# Altium PCB PCB1.PcbDoc
Units mil, origin at the board's own origin, x right, y up, seen from the top; angles counter-clockwise.
Board outline 994.28 x 876.17 mil, 4 copper layers (Top Layer, GND, POWER, Bottom Layer), stack 23.756 mil thick; 60 components, 56 nets, 295 pads, 99 vias.
Unrouted connection lines stored in the file: 2.
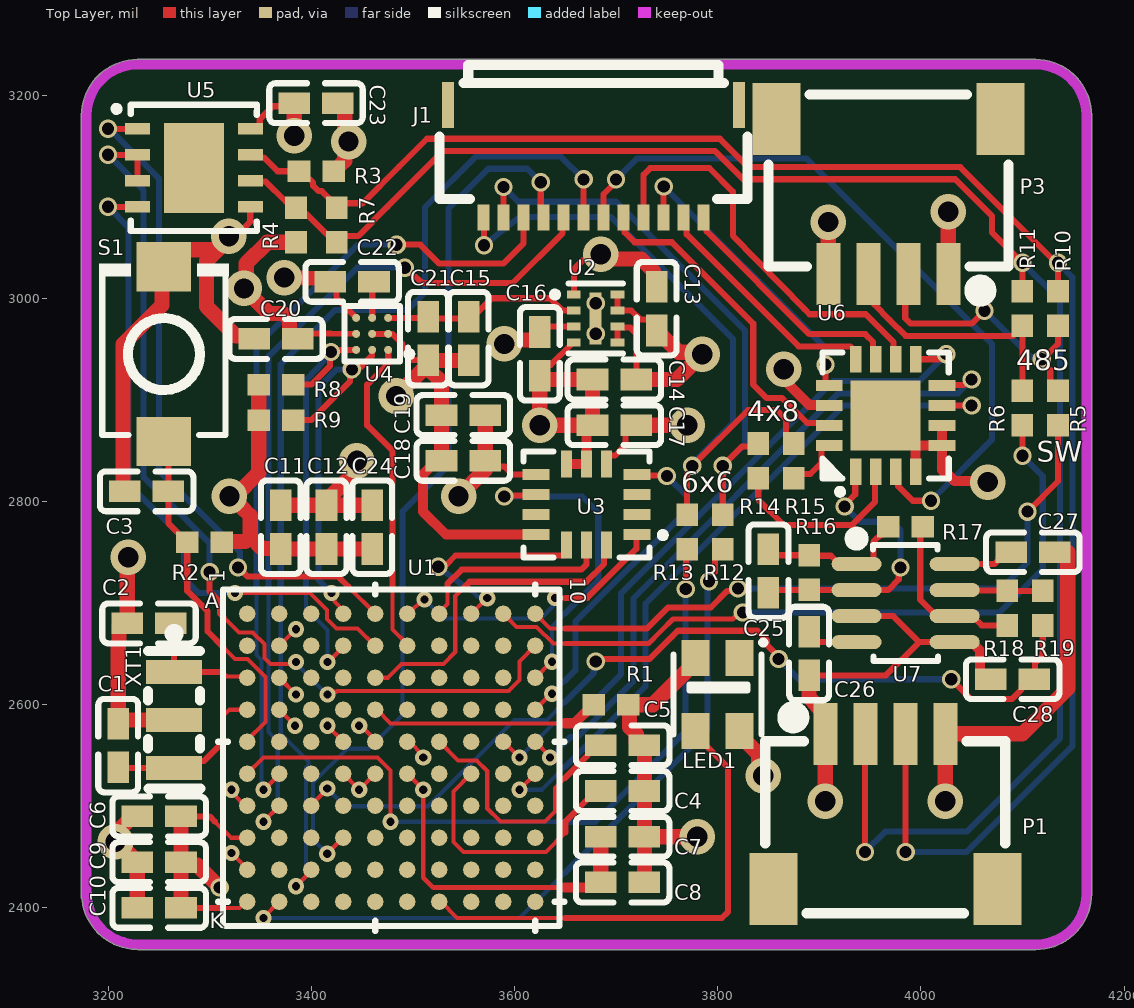
[diagram p0: Top Layer view]
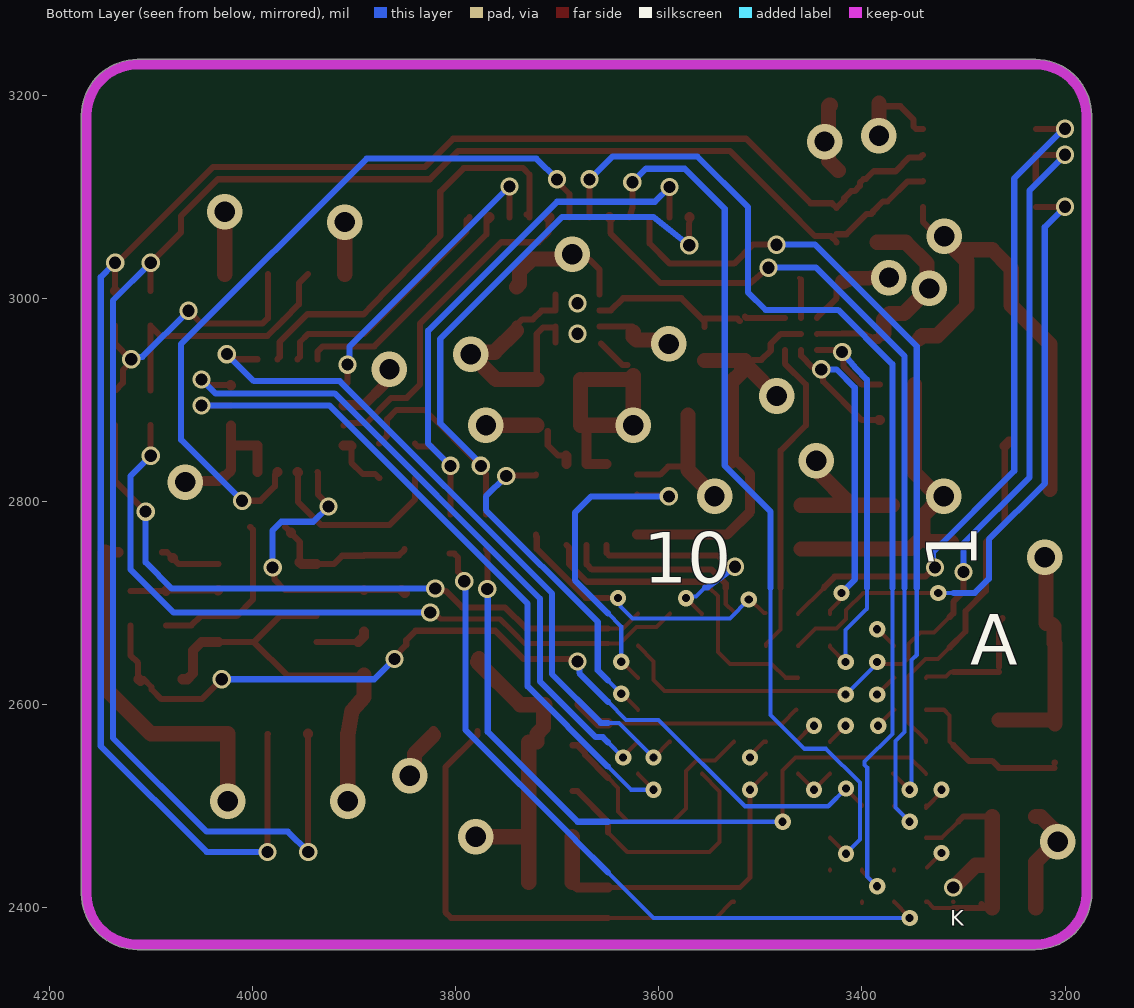
[diagram p1: Bottom Layer view, seen from below]
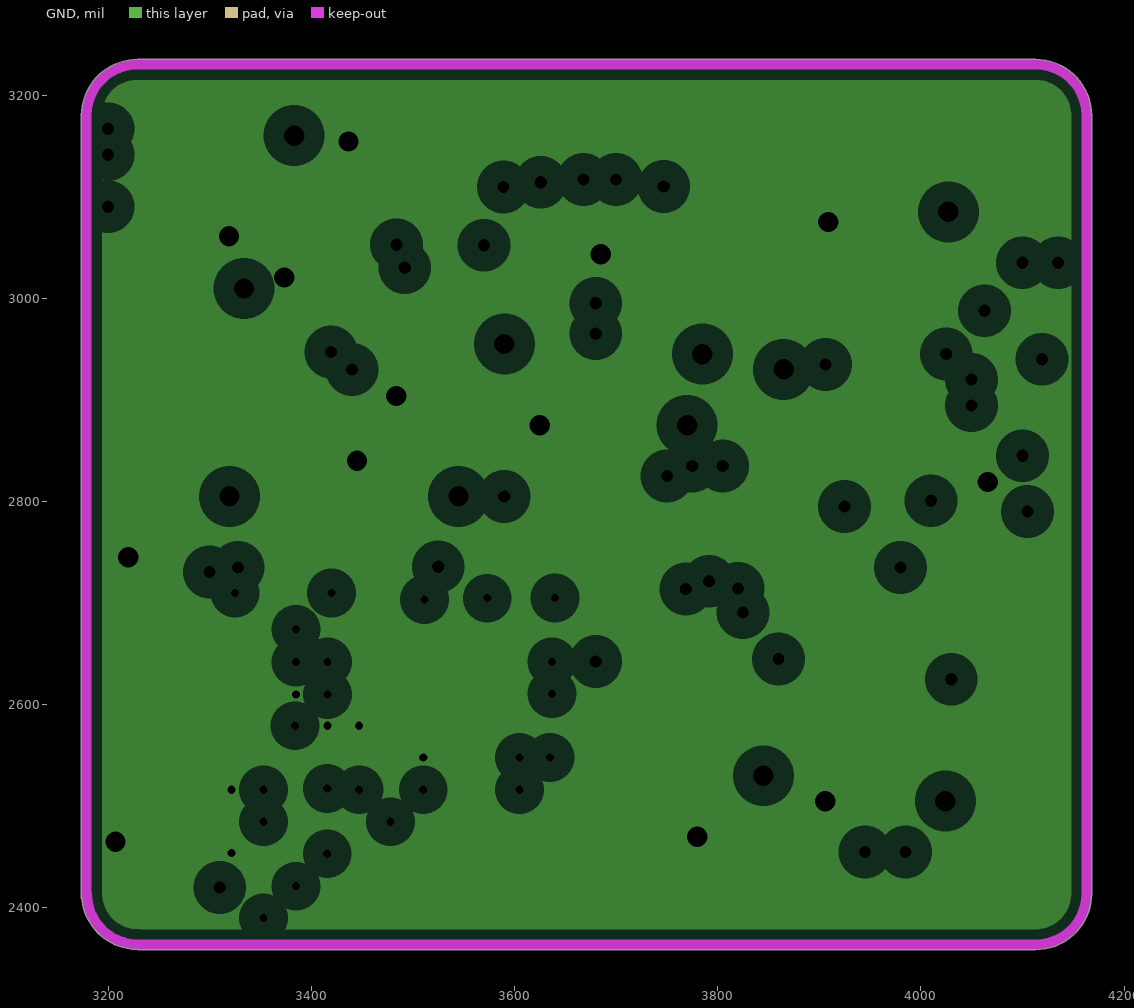
[diagram p2: GND, clearances drawn from the general rule]
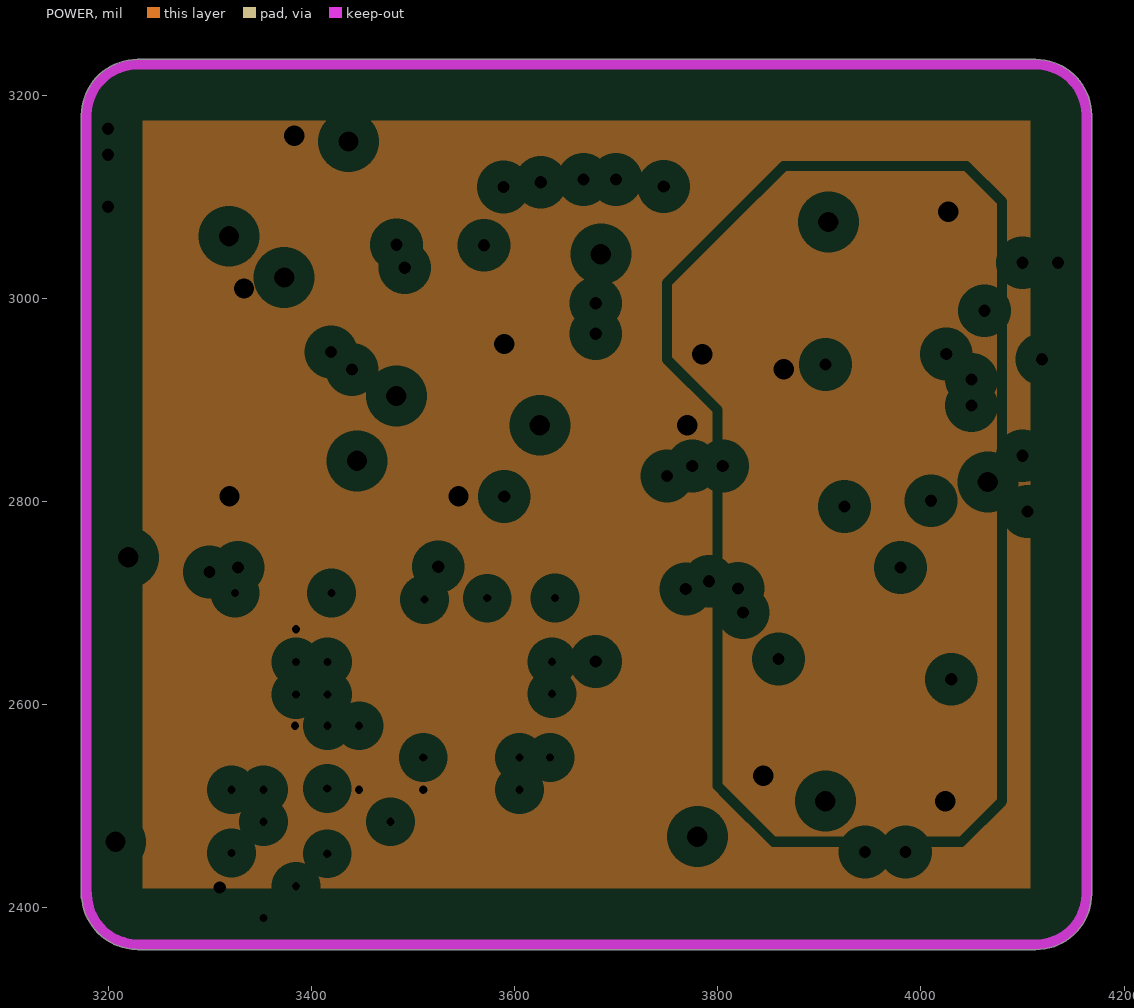
[diagram p3: POWER, clearances drawn from the general rule]
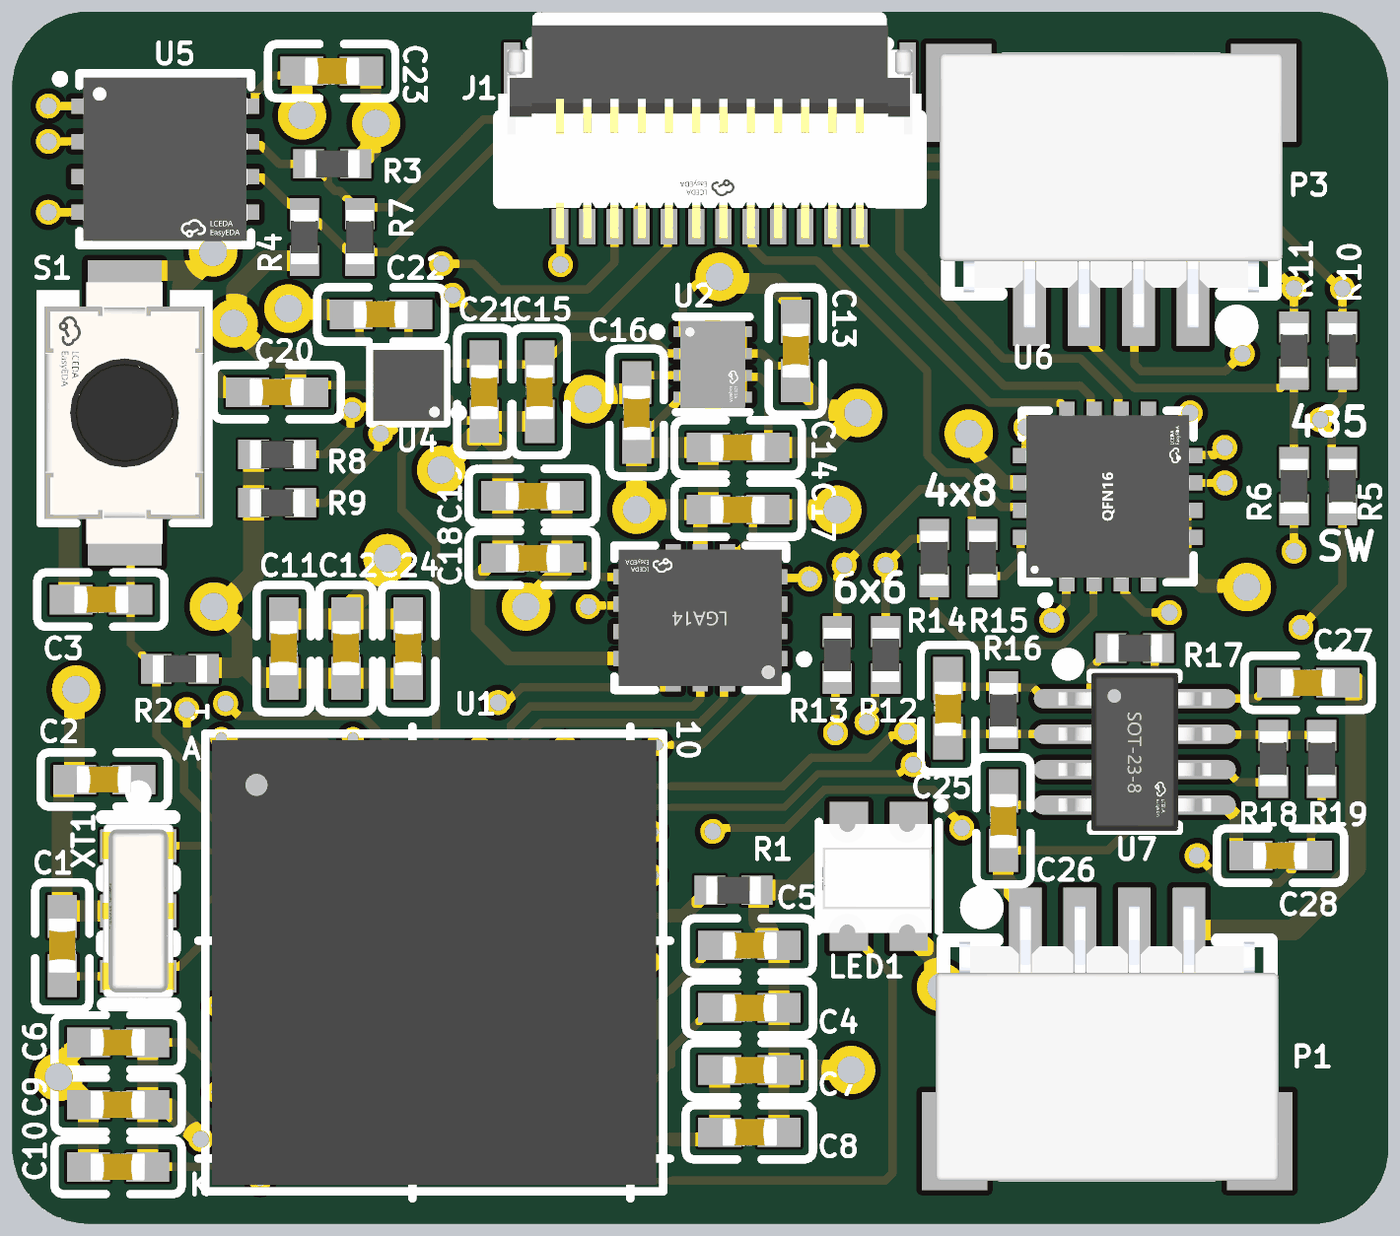
[diagram p4: 3D render of the assembled board from above, using the file's embedded part models]

## Layer stack, top to bottom
Top Solder: solder mask 0.4, Solder Resist, Dk 3.5
Top Layer: signal copper 1.4
Dielectric 2: prepreg 2.8, PP-006, Dk 4.1
GND: plane copper 1.378, net GND
Dielectric 1: dielectric 12.6, FR-4, Dk 4.8
POWER: plane copper 1.378, net (Multiple Nets)
Dielectric 3: prepreg 2.8, PP-006, Dk 4.1
Bottom Layer: signal copper 1.4
Bottom Solder: solder mask 0.4, Solder Resist, Dk 3.5

## Board outline
3173.84,2410 3173.84,3180 cw(c3228.86,3180) 3228.86,3235.01 4113.11,3235.01 cw(c4113.11,3180) 4168.13,3180 4168.13,2413.86 cw(c4113.11,2413.86) 4113.11,2358.84 3229.26,2358.84 3227.8,2359.06 cw(c3229.06,2414.06)

## Design rules (kind name [scope] priority, off if disabled: settings)
Clearance Clearance_BGA [WithinRoom('BGA')] p1: gap=3 ignorepadtopadclearanceinfootprint=TRUE
Clearance [All] p2: gap=6 ignorepadtopadclearanceinfootprint=FALSE
FanoutControl Fanout_BGA [IsBGA] p1: bgadir=Out bgaviamode=Centered fanoutstyle=BGA fanoutdirection=Alternating viagrid=1 // Fanout_BGA (Default Rule)
FanoutControl Fanout_Default [All] p5: bgadir=Out bgaviamode=Centered fanoutstyle=BGA fanoutdirection=Alternating viagrid=1 // Fanout_Default (Default Rule)
PlaneClearance [All] p1: clearance=20
PlaneConnect [All] p1: planeconnectstyle=Relief reliefexpansion=20 reliefentries=4 reliefconductorwidth=10 reliefairgap=10
PolygonConnect [All] p1: connectstyle=Relief reliefconductorwidth=10 reliefentries=4 polygonreliefangle="90 Angle" airgapwidth=10
RoomDefinition BGA [InComponentClass('Room Definition1')] p1: confinementstyle=ConfineIn formatcopy=TRUE lockcomponents=FALSE outline 3313.56,2385 3313.56,2715 3650,2715 3650,2385
RoutingVias RoutingVias_BGA [WithinRoom('BGA')] p1: holewidth=10 width=18 viastyle="Through Hole" minholewidth=10 minwidth=18 maxholewidth=10 maxwidth=18
RoutingVias [All] p2: holewidth=20 width=35 viastyle="Through Hole" minholewidth=10 minwidth=18 maxholewidth=20 maxwidth=35
ShortCircuit [All] p1: allowed=TRUE
SolderMaskExpansion [All] p1: expansion=4 istentingtop=FALSE
SupplyNets "Schematic Supply Nets" [InNet('+5V')] p1: voltage=0.000
SupplyNets "Schematic Supply Nets_5" [InNet('1.8V')] p2: voltage=0.000
SupplyNets "Schematic Supply Nets_3" [InNet('GND')] p3: voltage=0.000
SupplyNets "Schematic Supply Nets_2" [InNet('VDD')] p4: voltage=0.000
Width Width_BGA [WithinRoom('BGA')] p1: maxlimit=5 minlimit=4 preferedwidth=4 minimp=50.000000 maximp=50.000000 favimp=50.000000
Width [All] p2: maxlimit=20 minlimit=5 preferedwidth=6 minimp=50.000000 maximp=50.000000 favimp=50.000000
25 further rules are at their usual default settings.

## Components (designator, comment, footprint, x,y, rotation, side; value= is the part's Value field where it differs from the comment)
C1 "20pF" C0402 3210,2560 r270 top
C2 "20pF" C0402 3240,2680 r0 top
C3 "0.1μF" C0402 3238.22,2810 r180 top
C4 "2.2μF" C0402 3706.78,2515 r180 top
C5 "2.2μF" C0402 3706.78,2560 r180 top
C6 "1μF" C0402 3250,2490 r0 top
C7 "4.7μF" C0402 3706.78,2470 r180 top
C8 "0.1μF" C0402 3706.78,2425 r180 top
C9 "0.1μF" C0402 3250,2445 r0 top
C10 "0.1μF" C0402 3250,2400 r0 top
C11 "0.1μF" C0402 3370,2775 r270 top
C12 "0.1μF" C0402 3415,2775 r270 top
C13 "1μF" C0402 3740,2990 r270 top
C14 "1μF" C0402 3698,2920 r0 top
C15 "1μF" C0402 3555,2960 r90 top
C16 "1μF" C0402 3625,2945 r90 top
C17 "10nF" C0402 3698,2875 r0 top
C18 "0.1μF" C0402 3550,2840 r180 top
C19 "2.2μF" C0402 3550,2885 r180 top
C20 "0.1μF" C0402 3365,2960 r0 top
C21 "0.1μF" C0402 3515,2960 r90 top
C22 "2.2μF" C0402 3440,3016.19 r0 top
C23 "0.1μF" C0402 3405,3192 r180 top
C24 "0.1μF" C0402 3460,2775 r270 top
C25 "30pF" C0402 3850,2731.14 r90 top
C26 "0.1μF" C0402 3890,2650 r90 top
C27 "0.1μF" C0402 4110,2750 r0 top
C28 "1μF" C0402 4090,2625 r0 top
J1 "AFH05-S12FIA-1H" FPC-SMD_12P-P0.50_GT-F0501SR10-12S1101 3677.95,3135 r180 top
LED1 "WS2812B-2020" LED-SMD_4P-L2.0-W2.0-TL_WS2812B-2020 3800,2610 r270 top
P1 "Header 4" CONN-SMD_XDWF-0910-04P 3965,2495 r0 top
P3 "Header 4" CONN-SMD_XDWF-0910-04P 3968,3100 r180 top
R1 "10K" R0402 3695,2600 r180 top
R2 "10K" R0402 3295,2760 r0 top
R3 "10K" R0402 3405,3125 r180 top
R4 "10K" R0402 3385,3072.04 r270 top
R5 "22R" R0402 4135,2892.04 r90 top
R6 "22R" R0402 4100,2892.04 r90 top
R7 "120R" R0402 3425,3072.04 r90 top
R8 "10K" R0402 3365.32,2915 r0 top
R9 "10K" R0402 3365.32,2880 r0 top
R10 "0R" R0402 4135,2990 r90 top
R11 "0R" R0402 4100,2990 r270 top
R12 "0R" R0402 3805,2770 r90 top
R13 "0R" R0402 3770,2770 r270 top
R14 "0R" R0402 3840,2840 r90 top
R15 "0R" R0402 3875,2840 r270 top
R16 "1K" R0402 3890,2730 r90 top
R17 "10K" R0402 3985,2775 r0 top
R18 "10K" R0402 4085,2695 r90 top
R19 "100R" R0402 4120,2695 r270 top
S1 "SW-PB" SW-SMD_L3.9-W3.0-P4.45 3255,2945 r90 top
U1 "STM32H743VIH6" TFBGA100 3478.74,2547.76 r0 top
U2 "AP7345D-1833RH4-7" XDFN-8_L1.6-W1.2-P0.40-BL-EP 3680,2980 r270 top
U3 "ICM-42688-P" LGA-14_L3.0-W2.5-P0.50-TL 3670.98,2796.93 r180 top
U4 "BMM350" WLCSP-9_L1.3-W1.3-R3-C3-P0.40-TL 3460,2965 r180 top
U5 "SIT3088ETK" DFN-8_L3.0-W3.0-P0.65-BL-EP 3284.39,3128.38 r270 top
U6 "RS2251XTQC16" QFN-16_L3.0-W3.0-P0.50-BL-EP1.7 3965.41,2884.53 r0 top
U7 "LM358LVIDDFR" SOT-23-8_L2.9-W1.6-P0.65-LS2.8-BR 3985,2700 r180 top
XT1 "8MHz 3PIN" "8MHz 0.07% OSC-SMD_3P-L3.2-W1.3-P1.20-L" 3265,2585 r270 top

## Footprints (in the part's own frame and the unit in brackets; to place one, negate y for a bottom-side part, rotate by r counter-clockwise, add the part's x,y. Pads: shape width x height; smd on the part's side, far side on the other; paste and mask are expansions set on the pad)
"8MHz 0.07% OSC-SMD_3P-L3.2-W1.3-P1.20-L" [mm]
  rect 0.6x1.4 smd paste+0 mask+0.051: 1(-1.199,0) 2(0,0) 3(1.199,0)
  silkscreen extent -2.28,-0.65 1.72,0.66, body extent -1.6,-0.66 1.6,0.66, height 0.81
C0402 [mm]
  rect 0.79x0.54 smd mask+0.051: 1(-0.537,0) 2(0.553,0)
  silkscreen extent -1.16,-0.5 1.18,0.5, body extent -0.5,-0.25 0.5,0.25, height 0.5
CONN-SMD_XDWF-0910-04P [mm]
  rect 0.6x1.55 smd: 1(-1.5,1.938) 2(-0.5,1.938) 3(0.5,1.938) 4(1.5,1.938)
  rect 1.2x1.8 smd: 5(-2.8,-1.937) 6(2.8,-1.937)
  silkscreen extent -3,-2.55 3,2.55, body extent -3.15,-2.67 3.15,2.38, height 3.14
DFN-8_L3.0-W3.0-P0.65-BL-EP [mm] "SIT3088ETK"
  rect 0.28x0.625 smd: 1(-0.975,-1.412) 2(-0.325,-1.412) 3(0.325,-1.412) 4(0.975,-1.412) 5(0.975,1.412) 6(0.325,1.412) 7(-0.325,1.412) 8(-0.975,1.412)
  rect 2.25x1.5 smd: 9(0,0)
  silkscreen extent -1.58,-2.01 1.58,1.58, body extent -1.5,-1.51 1.5,1.51, height 0.92
FPC-SMD_12P-P0.50_GT-F0501SR10-12S1101 [mm]
  rect 0.3x0.65 smd paste+0 mask+0.05: 1(-2.749,1.405) 2(-2.251,1.405) 3(-1.751,1.405) 4(-1.25,1.405) 5(-0.75,1.405) 6(-0.249,1.405) 7(0.251,1.405) 8(0.751,1.405) 9(1.25,1.405) 10(1.751,1.405) 11(2.251,1.405) 12(2.752,1.405)
  rect 0.3x1.15 smd paste+0 mask+0.05: 13(-3.635,-1.405) 14(3.635,-1.405)
  silkscreen extent -3.85,-2.4 3.85,0.95, body extent -3.89,-2.29 3.89,1.63, height 1.03
LED-SMD_4P-L2.0-W2.0-TL_WS2812B-2020 [mm] "WS2812B-2020"
  rect 0.9x0.7 smd: 1(-0.915,0.55) 2(-0.915,-0.55) 3(0.915,-0.55) 4(0.915,0.55)
  silkscreen extent -1.3,-1.1 1,1.15, body extent -0.97,-1.04 1.03,0.97, height 0.84
LGA-14_L3.0-W2.5-P0.50-TL [mm] "ICM-42688-P"
  rect 0.675x0.28 smd: 1(-1.262,0.75) 2(-1.262,0.25) 3(-1.262,-0.25) 4(-1.262,-0.75) 8(1.262,-0.75) 9(1.262,-0.25) 10(1.262,0.25) 11(1.262,0.75)
  rect 0.28x0.675 smd: 5(-0.5,-1.012) 6(0,-1.012) 7(0.5,-1.012) 12(0.5,1.012) 13(0,1.012) 14(-0.5,1.012)
  silkscreen extent -1.98,-1.33 1.58,1.33, body extent -1.5,-1.25 1.5,1.25, height 0.92
QFN-16_L3.0-W3.0-P0.50-BL-EP1.7 [mm] "RS2251XTQC16 / QFN-16L(3x3)"
  rect 0.28x0.665 smd mask+0.051: 1(-0.75,-1.407) 2(-0.25,-1.407) 3(0.25,-1.407) 4(0.75,-1.407) 9(0.75,1.407) 10(0.25,1.407) 11(-0.25,1.407) 12(-0.75,1.407)
  rect 0.665x0.28 smd mask+0.051: 5(1.407,-0.75) 6(1.407,-0.25) 7(1.407,0.25) 8(1.407,0.75) 13(-1.407,0.75) 14(-1.407,0.25) 15(-1.407,-0.25) 16(-1.407,-0.75)
  rect 1.75x1.75 smd mask+0.051: 17(0,0)
  silkscreen extent -1.58,-1.98 1.58,1.58, body extent -1.5,-1.5 1.5,1.5, height 0.43
R0402 [mm]
  rect 0.566x0.54 smd mask+0.051: 1(-0.433,0) 2(0.433,0)
  body extent -0.5,-0.25 0.5,0.25, height 0.36
SOT-23-8_L2.9-W1.6-P0.65-LS2.8-BR [mm] "LM358LVIDDFR / TSOT-23-8"
  oval 1.252x0.35 smd: 1(1.226,-0.975) 2(1.226,-0.325) 3(1.226,0.325) 4(1.226,0.975) 5(-1.226,0.975) 6(-1.226,0.325) 7(-1.226,-0.325) 8(-1.226,-0.975)
  silkscreen extent -0.81,-1.76 1.38,1.45, body extent -1.41,-1.45 1.41,1.45, height 1.65
SW-SMD_L3.9-W3.0-P4.45 [mm] "TS-1088R-02026"
  rect 1.23x1.36 smd: 1(-2.185,0) 2(2.185,0)
  silkscreen extent -2.03,-1.62 2.25,1.62, body extent -2.4,-1.45 2.4,1.45, height 1.95
TFBGA100 [mil]
  round 16 smd paste+0 mask+3: A1(-141.73,141.73) A2(-110.24,141.73) A3(-78.74,141.73) A4(-47.24,141.73) A5(-15.75,141.73) A6(15.75,141.73) A7(47.24,141.73) A8(78.74,141.73) A9(110.24,141.73) A10(141.73,141.73) B1(-141.73,110.24) B2(-110.24,110.24) B3(-78.74,110.24) B4(-47.24,110.24) B5(-15.75,110.24) B6(15.75,110.24) B7(47.24,110.24) B8(78.74,110.24) B9(110.24,110.24) B10(141.73,110.24) C1(-141.73,78.74) C2(-110.24,78.74) C3(-78.74,78.74) C4(-47.24,78.74) C5(-15.75,78.74) C6(15.75,78.74) C7(47.24,78.74) C8(78.74,78.74) C9(110.24,78.74) C10(141.73,78.74) D1(-141.73,47.24) D2(-110.24,47.24) D3(-78.74,47.24) D4(-47.24,47.24) D5(-15.75,47.24) D6(15.75,47.24) D7(47.24,47.24) D8(78.74,47.24) D9(110.24,47.24) D10(141.73,47.24) E1(-141.73,15.75) E2(-110.24,15.75) E3(-78.74,15.75) E4(-47.24,15.75) E5(-15.75,15.75) E6(15.75,15.75) E7(47.24,15.75) E8(78.74,15.75) E9(110.24,15.75) E10(141.73,15.75) F1(-141.73,-15.75) F2(-110.24,-15.75) F3(-78.74,-15.75) F4(-47.24,-15.75) F5(-15.75,-15.75) F6(15.75,-15.75) F7(47.24,-15.75) F8(78.74,-15.75) F9(110.24,-15.75) F10(141.73,-15.75) G1(-141.73,-47.24) G2(-110.24,-47.24) G3(-78.74,-47.24) G4(-47.24,-47.24) G5(-15.75,-47.24) G6(15.75,-47.24) G7(47.24,-47.24) G8(78.74,-47.24) G9(110.24,-47.24) G10(141.73,-47.24) H1(-141.73,-78.74) H2(-110.24,-78.74) H3(-78.74,-78.74) H4(-47.24,-78.74) H5(-15.75,-78.74) H6(15.75,-78.74) H7(47.24,-78.74) H8(78.74,-78.74) H9(110.24,-78.74) H10(141.73,-78.74) J1(-141.73,-110.24) J2(-110.24,-110.24) J3(-78.74,-110.24) J4(-47.24,-110.24) J5(-15.75,-110.24) J6(15.75,-110.24) J7(47.24,-110.24) J8(78.74,-110.24) J9(110.24,-110.24) J10(141.73,-110.24) K1(-141.73,-141.73) K2(-110.24,-141.73) K3(-78.74,-141.73) K4(-47.24,-141.73) K5(-15.75,-141.73) K6(15.75,-141.73) K7(47.24,-141.73) K8(78.74,-141.73) K9(110.24,-141.73) K10(141.73,-141.73)
  silkscreen extent -170,-170 170,170, body extent -161,-161 161,161, height 43
WLCSP-9_L1.3-W1.3-R3-C3-P0.40-TL [mm] "BMM350"
  round 0.2 smd paste-100 mask+0.051: A1(-0.4,0.4) A2(0,0.4) A3(0.4,0.4) B1(-0.4,0) B2(0,0) B3(0.4,0) C2(0,-0.4) C3(0.4,-0.4)
  round 0.2 smd mask+0.051: C1(-0.4,-0.4)
  silkscreen extent -1,-0.7 0.7,0.7, body extent -0.65,-0.65 0.65,0.65, height 0.53
XDFN-8_L1.6-W1.2-P0.40-BL-EP [mm] "AP7345D-1833RH4-7"
  rect 0.2x0.345 smd: 1(-0.6,-0.547) 2(-0.2,-0.547) 3(0.2,-0.547) 4(0.6,-0.547) 5(0.6,0.547) 6(0.2,0.547) 7(-0.2,0.547) 8(-0.6,0.547)
  rect 1.3x0.3 smd: 9(0,0)
  silkscreen extent -0.88,-1.09 0.88,0.68, body extent -0.81,-0.61 0.81,0.61, height 0.4

## Part data
C1 C2 C3 C4 C5 C6 C7 C8 C9 C10 C11 C12 C13 C14 C15 C16 C17 C18 C19 C20 C21 C22 C23 C24 C25 C26 C27 C28: library part "Cap Semi", "Capacitor (Semiconductor SIM Model)", LatestRevisionDate=29-May-2009, LatestRevisionNote="IPC-7351 Footprint Added.", PackageDescription="Chip Capacitor", PackageReference=C1206, Published=8-Jun-2000, Publisher="Altium Limited"
P1 P3: "XDWF-0910-04P", LatestRevisionDate=17-Jul-2002, LatestRevisionNote="Re-released for DXP Platform.", Publisher="Altium Limited"
R1 R2 R3 R4 R5 R6 R7 R8 R9 R10 R11 R16 R17 R18 R19: library part Res2, "Resistor", LatestRevisionDate=17-Jul-2002, LatestRevisionNote="Re-released for DXP Platform.", PackageDescription="Axial Device, Thru-Hole; 2 Leads; 0.4 in Pin Spacing", PackageReference=AXIAL-0.4, Published=8-Jun-2000, Publisher="Altium Limited"
R12: library part Res2, "Resistor / 6x6 Y2", LatestRevisionDate=17-Jul-2002, LatestRevisionNote="Re-released for DXP Platform.", PackageDescription="Axial Device, Thru-Hole; 2 Leads; 0.4 in Pin Spacing", PackageReference=AXIAL-0.4, Published=8-Jun-2000, Publisher="Altium Limited"
R13: library part Res2, "Resistor / 6x6 Y1", LatestRevisionDate=17-Jul-2002, LatestRevisionNote="Re-released for DXP Platform.", PackageDescription="Axial Device, Thru-Hole; 2 Leads; 0.4 in Pin Spacing", PackageReference=AXIAL-0.4, Published=8-Jun-2000, Publisher="Altium Limited"
R14: library part Res2, "Resistor / 4x8 X8", LatestRevisionDate=17-Jul-2002, LatestRevisionNote="Re-released for DXP Platform.", PackageDescription="Axial Device, Thru-Hole; 2 Leads; 0.4 in Pin Spacing", PackageReference=AXIAL-0.4, Published=8-Jun-2000, Publisher="Altium Limited"
R15: library part Res2, "Resistor / 4x8 X7", LatestRevisionDate=17-Jul-2002, LatestRevisionNote="Re-released for DXP Platform.", PackageDescription="Axial Device, Thru-Hole; 2 Leads; 0.4 in Pin Spacing", PackageReference=AXIAL-0.4, Published=8-Jun-2000, Publisher="Altium Limited"
S1: "TS-1088R-02026", LatestRevisionDate=17-Jul-2002, LatestRevisionNote="Re-released for DXP Platform.", PackageDescription="Switch; 2 Leads", PackageReference=SPST-2, Published=24-Mar-1999, Publisher="Altium Limited"
U1: "No Description Available", Mfr_Name=STMicroelectronics, RefDes=RefDes, Type=Type
XT1: library part "8MHz 0.07% 3PIN_1", "CSTNE8M00GH5C000R0"

## Via types
v1: diameter 18, hole 12, Top Layer to Bottom Layer, 45 vias
v2: diameter 16, hole 8, Top Layer to Bottom Layer, 30 vias
v3: diameter 35, hole 20, Top Layer to Bottom Layer, 24 vias

## Nets (pads, with @x,y where several pads share a name; then routed paths per layer and width w, separated by ;. In a path a pad name is that pad's centre, name@x,y a point inside that pad or via, vN(x,y) a via of type N, cw(c..) or ccw(c..) an arc to the next point about the centre after c; other vN are vias at no path point)
1.8V: C15.2 C21.2 U2.2 U4.C1 | length 199
  Top Layer w6: U4.C1 3513.97,2980.75 C21.2 ; C21.2@3520.19,2977.56 3522.63,2980 C15.2@3555,2980 ; C15.2@3555,2971.7 3555,2977.37 3577.63,3000 3635,3000 3646.97,2988.03 3658.28,2988.03 U2.2
+5V: C13.2 C14.2 C27.2 LED1.4 P1.4 P3.1 U2.5 U2.6 U2.7 U2.8 U6.14 | length 805.2
  Top Layer w6: U2.5 U2.6 3702.62,2971.07 3713.93,2971.07 3720,2965 C14.2@3720,2925 ; U2.8 U2.7 3715.23,2987.87 3723.98,2979.12 3734.11,2979.12 C13.2@3740,2973.22
  Top Layer w10: C13.2@3740,2968.3 C13.2@3740,2973.22 ; LED1.4@3821.66,2570.04 LED1.4 ; v3@3840.22,2534.78 v3(3845,2530) ; v3(3865,2930) 3869.78,2925.22 3869.78,2915.22 3890.12,2894.88 3909.49,2894.88 U6.14 ; C27.2 C27.2@4144.61,2750 ; 4144.61,2616.1 4144.61,2616.49
  Top Layer w15: C14.2 3760,2920 v3(3785,2945) 3783.1,2946.9 3761.41,2946.9 C13.2@3740,2968.3 ; LED1.4@3821.66,2570.04 3840.22,2551.48 v3@3840.22,2534.78 ; v3(4024.05,2505) P1.4 4099.8,2571.28 4144.61,2616.1 ; P3.1 v3(4027.05,3085) ; 4144.61,2616.49 C27.2@4144.61,2750
A: U1.E9 U6.9 | length 683.4
  Top Layer w4: U1.E9 3589.24,2563.5 3604.74,2548 v2(3605,2548)
  Top Layer w6: U6.9 4017.78,2939.94 v1@4022.84,2945
  Bottom Layer w4: v2(3605,2548) 3639.03,2582.03 3650,2582.03
  Bottom Layer w6: 3650,2582.03 3657.03,2582.03 3705,2630 3705,2709.45 3913.92,2918.37 3998.37,2918.37 v1(4025,2945)
ADC1_INP3(Y4/Y6): J1.7 U1.J3 | length 1031.3
  Top Layer w4: v2(3385,2421.26) 3400,2436.26 U1.J3
  Top Layer w6: J1.7 v1(3668.07,3117)
  Bottom Layer w4: 3370,2715 3370,2571.16 3397.31,2543.85 3397.31,2540.54 3394.75,2537.97 3394.75,2431.01 v2(3385,2421.26)
  Bottom Layer w6: 3370,2715 3370,2935 3423.48,2988.48 3494.89,2988.48 3511.97,3005.56 3511.97,3089.66 3561.8,3139.48 3645.59,3139.48 v1(3668.07,3117)
ADC1_INP4(X2): J1.2 U6.12 | length 239.7
  Top Layer w6: J1.2@3767.48,3078.78 3769.48,3076.78 3769.48,3063 3879.84,2952.64 3930.76,2952.64 3935.88,2947.52 U6.12
  Top Layer w10: J1.2 J1.2@3767.48,3078.78
ADC1_INP5(X5): J1.5 U6.15 | length 330.7
  Top Layer w6: J1.5@3708.38,3078.78 3708.38,3065 3718.28,3055.1 3754.9,3055.1 3835,2975 3835,2915 3848,2902 3863.2,2902 3888,2877.2 3907.49,2877.2 U6.15
  Top Layer w10: J1.5 J1.5@3708.38,3078.78
ADC1_INP7(X3): J1.3 U6.13 | length 293.5
  Top Layer w6: J1.3 v1(3746.87,3110) ; v1(3906.22,2934.64) 3906.22,2916.57 U6.13@3910,2916.57
  Bottom Layer w6: v1(3746.87,3110) 3904.23,2952.64 3904.23,2936.63 v1(3906.22,2934.64)
ADC1_INP8(Y2/Y4): J1.9 U1.H4 | length 878.3
  Top Layer w4: v2(3415.75,2453.27) U1.H4
  Top Layer w6: v1(3625.9,3114.17) 3625.9,3089.48 J1.9
  Bottom Layer w4: v2(3415.75,2453.27) 3401.75,2467.27 3401.75,2523.16 3435.17,2556.58 3456.58,2556.58 3490,2590 3490,2715
  Bottom Layer w6: 3490,2715 3490,2790.3 3535,2835.3 3535,3088.13 3574.35,3127.48 3612.59,3127.48 v1(3625.9,3114.17)
ADC1_INP9(X1): J1.1 U6.11 | length 242.1
  Top Layer w6: J1.1 3789.08,3076.78 3789.08,3065.92 3890.24,2964.76 3906.44,2964.64 3945.36,2964.64 3953.06,2956.94 3953.06,2942.45 U6.11
ADC1_INP10(X7/Y1): J1.12 R13.1 R15.1 | length 669.5
  Top Layer w6: J1.12@3569.81,3079.49 3570,3069.89 v1(3570,3052.17) ; R13.1 3770,2826.75 3775,2831.75 v1(3775,2835) 3830,2890 3858.23,2890 3867.37,2880.86 3867.37,2864.67 R15.1
  Top Layer w10: J1.12 J1.12@3569.81,3079.49
  Bottom Layer w6: v1(3570,3052.17) 3605,3080 3695,3080 3815,2960 3815,2876.97 3775,2836.97 v1(3775,2835)
ADC1_INP11(Y1/Y3): J1.10 U1.F2 | length 807.7
  Top Layer w4: v2@3353.75,2516.54 U1.F2@3369.5,2532.28
  Top Layer w6: v1(3484.04,3052.74) 3507.26,3052.74 3525.83,3034.17 3589.17,3034.17 3609.02,3054.02 J1.10
  Bottom Layer w4: 3346,2715 3346,2649 3351,2644 3351,2518.26 v2(3353,2516.26)
  Bottom Layer w6: 3346,2715 3346,2952.75 3445.99,3052.74 v1(3484.04,3052.74)
ADC1_INP14(X4): J1.4 U6.10 | length 409.4
  Top Layer w6: J1.4@3730.08,3082.59 J1.4 3727.17,3121.66 3733.51,3128 3792,3128 3815,3105 3815,3061.69 3885.13,2989.48 3890.41,2984.21 3945.79,2984.21 3972.99,2957.01 3972.99,2942.2 U6.10
ADC1_INP15(X8/Y2): J1.11 R12.2 R14.2 | length 560.3
  Top Layer w6: J1.11 v1(3589.32,3109.48) ; R12.2 v1(3805,2835) 3823.88,2853.88 3836.84,2853.88 R14.2
  Bottom Layer w6: v1(3589.32,3109.48) 3603.81,3095 3700,3095 3827,2968 3827,2857 v1(3805,2835)
ADC1_INP16(Y3/Y5): J1.8 U1.G2 | length 857.1
  Top Layer w4: v2(3353,2484.76) U1.G2@3368.5,2500.27
  Top Layer w6: v1(3491.97,3030.08) 3509.52,3015 3598.3,3015 3647.47,3064.17 J1.8@3647.47,3078.78
  Top Layer w10: J1.8@3647.47,3078.78 J1.8
  Bottom Layer w4: v2(3353,2484.76) 3367,2498.76 3367,2564.26 3358,2573.26 3358,2715
  Bottom Layer w6: 3358,2715 3358,2943 3445.08,3030.08 v1(3491.97,3030.08)
ADC1_INP17(X6): J1.6 U6.3 | length 729.1
  Top Layer w6: J1.6 3687.77,3102.61 v1@3700,3114.84 ; U6.3@3975.12,2828.99 3977.76,2826.36 3977.76,2814.97 3992,2800.73 4009.9,2800.73 v1(4010,2800.63)
  Top Layer w10: v1@3700,3114.84 v1(3700,3117) ; U6.3@3975.12,2828.99 U6.3
  Bottom Layer w6: v1(3700,3117) 3720.48,3137.48 3887.52,3137.48 4070,2955 4070,2860.63 v1(4010,2800.63)
B: U1.E10 U6.8 | length 667.8
  Top Layer w4: U1.E10 3635,2548.98 v2(3635,2548)
  Top Layer w6: U6.8@4021.33,2914.57 4042.41,2914.57 v1@4047.84,2920
  Top Layer w10: U6.8 U6.8@4021.33,2914.57
  Bottom Layer w4: v2(3635,2548) 3650,2563
  Bottom Layer w6: 3650,2563 3655.03,2568.03 3662.06,2568.03 3717,2622.97 3717,2704.48 3918.89,2906.37 4036.37,2906.37 v1@4048.47,2918.47
  Bottom Layer w10: v1@4048.47,2918.47 v1(4050,2920)
BMM350_INT: U1.B6 U4.A1 | length 316.2
  Top Layer w4: 3480,2715 3480,2674.1 3494.49,2659.62 U1.B6
  Top Layer w6: U4.A1 3475.75,2935.75 3455,2915 3455,2875 3480,2850 3480,2715
C: U1.F10 U6.7 | length 700.7
  Top Layer w4: v2(3605,2516.26) 3605,2516.4 3620.47,2531.87 U1.F10
  Top Layer w6: U6.7 v1(4050,2894.37)
  Bottom Layer w4: v2(3605,2516.26) 3627.26,2516.26 3650,2539
  Bottom Layer w6: 3650,2539 3729,2618 3729,2699.51 3923.86,2894.37 v1@4049.37,2894.37
  Bottom Layer w10: v1@4049.37,2894.37 v1(4050,2894.37)
GND: C1.1 C2.1 C3.2 C4.1 C5.1 C6.1 C7.1 C8.1 C9.1 C10.1 C11.1 C12.1 C13.1 C14.1 C15.1 C16.1 C17.1 C18.2 C19.2 C20.1 C21.1 C22.1 C23.1 C24.1 C26.1 C28.1 LED1.2 P1.1 P3.4 R1.1 R3.1 S1.2 U1.C2 U1.E4 U1.E5 U1.E6 U1.G1 U1.J1 U2.1 U2.4 U3.6 U3.7 U3.11 U4.B1 U4.B2 U4.C3 U5.5 U6.4 U6.5 U6.6 U6.17 U7.3 U7.5 XT1.2 | length 3046.7
  Top Layer w4: v2(3321.56,2453.95) U1.J1@3336,2439.51 ; v2@3321.56,2513.95 U1.G1@3336,2499.51 ; U1.G1@3335.86,2499.36 U1.G1@3336,2499.51 ; U1.G1@3337.01,2498.5 U1.G1@3336,2499.51 ; U1.G1 U1.G1@3336,2499.51 ; U1.C2 v2(3384.97,2610) ; v2(3416,2579.25) 3416,2579.13 3431.5,2563.63 U1.E4 ; v2@3449.9,2579.88 3449.9,2578.24 3462.99,2565.15 U1.E5 ; U1.E6 3496.5,2563.5 v2@3510,2550
  Top Layer w6: v3@3320,3060 3324.51,3060 3340,3075.49 U5.5 ; C22.1 3424.93,3010.11 3424.93,3000.07 U4.C3 ; R3.1 R3.1@3422.55,3125 ; U4.B2 U4.B1 3479.71,2965 3489.69,2955.02 3489.69,2948.54 3498.88,2939.34 3507.37,2939.34 C21.1@3509.65,2937.06 ; C16.1@3630.63,2934.41 3635.74,2934.41 U2.4@3656.65,2955.32 ; U2.1 3658.45,3028.45 3667.84,3037.84 3679.45,3037.84 v3(3685,3043.39) 3689.78,3043.39 v3@3695.73,3043.39 ; C26.1 3965.64,2628.86 3998.39,2661.61 ; U7.3 3972.79,2687.21 3998.39,2661.61 ; U7.5 3998.39,2661.61
  Top Layer w10: C18.2 3523.3,2840 3510,2826.7 3510,2790 3532.6,2767.4 U3.11 ; U3.7 U3.6 3670.99,2869.37 3676.62,2875 C17.1 ; v3(3685,3043.39) v3@3689.78,3038.6 ; LED1.2@3777.32,2645 LED1.2 LED1.2@3778.34,2642.09 ; U6.4 3994.86,2829.2 3994.86,2855.08 4020.74,2855.08 U6.5 ; U6.6 U6.5 ; U7.5 4050,2661.61 4058.3,2653.31 4058.3,2630.63 4063.93,2625 C28.1 ; v3(4065.92,2819.08) 4065,2820 4033.42,2820 4028.42,2825 4026.68,2825 4020.82,2830.86 U6.5
  Top Layer w15: C1.1 3210,2660 3210.8,2660.8 3210.8,2676.87 C2.1@3213.3,2679.37 ; C1.1@3213.86,2585 XT1.2 ; C3.2@3214.73,2812.12 3214.73,2954.73 3253.09,2993.09 3253.09,3029.11 S1.2 3271.71,3047.73 3302.32,3047.73 ; C2.1 3218.86,2743.86 v3(3220,2745) ; C10.1 C9.1 3208.86,2465 3211.18,2467.33 3211.18,2477.25 3223.93,2490 C6.1 ; v3(3318.98,3061.02) 3318.98,3058.98 3296.84,3036.84 3296.84,2991.91 3325.61,2963.13 3340.72,2963.13 C20.1 ; C11.1 C12.1 ; v3(3373.39,3020.39) 3410.8,3019.32 C22.1 ; R3.1@3423.27,3125.72 3432.89,3135.35 3432.89,3150.39 v3(3436.72,3154.22) 3432.89,3158.04 3432.89,3188.87 3431.76,3190 C23.1@3431.07,3190 ; v3(3445,2840) 3441.17,2836.17 3441.17,2827.24 3415,2801.07 C12.1 ; C24.1 C12.1 ; v3(3483.79,2903.79) 3510.8,2930.8 3511.87,2930.8 3515,2933.93 C21.1 C15.1 ; C21.1@3515,2930.8 3518.13,2930.8 3518.13,2927.67 3528.22,2917.58 C19.2 C18.2 ; C16.1 v3(3625,2875) C17.1@3676.62,2875 ; C16.1@3628.86,2920 C14.1@3672.08,2920 ; C17.1 C14.1 ; v3@3689.78,3038.6 3690.74,3039.56 3694.24,3039.56 3695.2,3038.6 3724.84,3038.6 3736.87,3026.57 3736.87,3014.28 C13.1 ; C5.1@3727.74,2563.13 3719.87,2563.13 3719.87,2571.2 3713.35,2577.72 3713.35,2598.69 R1.1 3736.26,2600 LED1.2@3778.34,2642.09 ; C8.1 C7.1 ; C5.1@3727.92,2562.95 C5.1 C4.1 C7.1 ; LED1.2@3776.81,2645.51 LED1.2@3777.32,2645 ; v3(3780,2470) C7.1 ; C26.1 3890,2620.8 3890,2607.64 3901.63,2594.29 P1.1 v3(3905.95,2505) ; P3.4 v3(3908.95,3075)
  other v2: 3321.56,2516.26 3510.24,2548 3447.15,2579.25
  other v3: 3207.36,2465
I2C1_SCL: R8.2 U1.B4 U4.A3 | length 433.2
  Top Layer w4: v2@3416,2640 3416,2641.25 3431.5,2656.74 U1.B4
  Top Layer w6: R8.2 3400,2915 3418.27,2933.27 3418.27,2941.49 v1(3419.47,2947.13) ; v1@3420,2945 3423.25,2945 3427.5,2949.25 U4.A3
  Bottom Layer w4: 3395,2715 3395,2694.4 3416,2673.4 v2@3416,2640
  Bottom Layer w6: 3395,2715 3395,2920 3405.93,2930.93 v1(3419.47,2947.13)
  other v2: 3416,2642
I2C1_SDA: R9.2 U1.A4 U4.A2 | length 388.7
  Top Layer w4: v2(3420,2710) 3422.68,2707.32 3422.68,2701.55 3431.5,2692.74 U1.A4
  Top Layer w6: R9.2@3382.86,2880 3400,2880 3438.27,2918.27 3438.27,2928.27 3442.3,2932.3 3448.86,2932.3 3459.76,2943.19 3459.76,2949.01 U4.A2
  Top Layer w10: R9.2 R9.2@3382.86,2880
  Bottom Layer w4: v2@3415,2715 v2(3420,2710)
  Bottom Layer w6: v2@3415,2715 3407,2723 3407,2912 3425,2930 v1(3440,2930)
ICM_INT1: U1.D10 U3.4 | length 330.5
  Top Layer w4: U1.D10 3636.22,2610.75 v2(3636.87,2610.75)
  Top Layer w6: U3.4 3721.4,2825.73 3749.27,2825.73 v1(3750,2825)
  Bottom Layer w4: v2(3636.87,2610.75) 3650,2623.88
  Bottom Layer w6: 3650,2623.88 3660,2633.88 3660,2681.49 3770,2791.49 3770,2805 v1(3750,2825)
ICM_INT2: U1.C10 U3.9 | length 320.2
  Top Layer w4: U1.C10 3620.47,2626.17 3636.54,2642.25 v2(3636.87,2642.25)
  Top Layer w6: v1(3590,2805) 3590.88,2805.88 3620.41,2805.88 U3.9
  Bottom Layer w4: v2(3636.87,2642.25) 3636.87,2676.87 3650,2690
  Bottom Layer w6: v1(3590,2805) 3666.49,2805 3682.5,2788.99 3682.5,2722.5 3650,2690
NetC4_2: C4.2 U1.F8 | length 254.6
  Top Layer w4: U1.F8 3540,2514.53 3540,2465 3550,2455 3630.94,2455 3650,2474.06
  Top Layer w6: 3650,2474.06 3650,2484.92 3680.08,2515 C4.2
NetC5_2: C5.2 U1.E7 | length 258.7
  Top Layer w4: U1.E7 3544.49,2545 3552.09,2545 3562.86,2545.01 3573.23,2534.64 3573.23,2497.88 3586.1,2485 3630,2485 3640,2495 3640,2518.07 3650,2528.07
  Top Layer w6: 3650,2528.07 3672.45,2550.51 3672.45,2552.37 3680.08,2560 C5.2
NetC22_2: C22.2 U4.C2 | length 40
  Top Layer w4: C22.2@3460,3018.22 C22.2@3461.78,3020
  Top Layer w6: U4.C2 C22.2@3460,3018.22
NetC25_2: C25.2 R16.2 R17.1 U7.1 | length 151.2
  Top Layer w6: C25.2 3850,2752.67 3855.63,2747.04 R16.2 ; R16.2@3890,2746.53 3911.57,2746.53 3919.71,2738.39 U7.1 ; U7.1@3953.24,2740.14 3953.24,2760.28 R17.1@3961.82,2768.86 ; R17.1@3961.82,2769.37 3967.45,2775 R17.1
  Top Layer w10: U7.1 3951.49,2738.39 U7.1@3953.24,2740.14 ; R17.1@3961.82,2768.86 R17.1@3961.82,2769.37
NetC26_2: C26.2 U7.4 | length 53.6
  Top Layer w6: C26.2@3895.63,2661.61 U7.4
  Top Layer w10: C26.2 3890,2667.24 C26.2@3895.63,2661.61
NetC27_1: C27.1 U7.8 | length 60.5
  Top Layer w6: U7.8 4072.44,2738.39 C27.1@4078.3,2744.25 ; C27.1@4078.3,2744.37 4083.93,2750 C27.1
  Top Layer w10: C27.1@4078.3,2744.25 C27.1@4078.3,2744.37
NetP3_2: P3.2 R5.2 R10.1 | length 282.3
  Top Layer w6: P3.2@3984.68,3023.72 3984.68,2980.32 3990,2975 4050,2975 v1(4062.73,2987.73) ; v1(4119.11,2940) v1@4120,2940 ; R5.2 4127.37,2916.71 4127.37,2929.38 4120,2936.75 v1@4120,2940 ; R10.1 4135,2955 v1@4120,2940
  Bottom Layer w6: v1(4062.73,2987.73) 4108.16,2942.3 4116.81,2942.3 v1(4119.11,2940)
NetP3_3: P3.3 R6.2 R11.2 | length 260.1
  Top Layer w6: P3.3@3945.32,3023.72 3954.13,3014.91 3954.13,2993.9 3969.58,2978.45 3985.03,2963 4090.55,2963 4100,2972.45 R11.2 ; R6.2 R11.2@4100,2972.63
NetR1_2: R1.2 U1.D5 | length 226.5
  Top Layer w4: U1.D5@3464.62,2595 3477.98,2581.64 3650,2581.64
  Top Layer w10: 3650,2581.64 3659.09,2581.64 3677.45,2600 R1.2
NetR12_1: R12.1 U1.K2 | length 696.4
  Top Layer w6: v1(3791.43,2721.43) 3791.43,2724.67 3797.37,2730.62 3797.37,2744.82 3801.12,2748.57 R12.1@3805.61,2748.57
  Bottom Layer w4: v2(3353,2390) 3605.15,2390 3650,2434.85
  Bottom Layer w6: 3650,2434.85 3681.89,2466.74 3681.89,2466.89 3790,2575 3790,2720 v1(3791.43,2721.43)
NetR13_2: R13.2 U1.F1 | length 710.8
  Top Layer w4: U1.F1 3353,2548 3465.38,2548 3478,2535.38 v2(3478,2484.76)
  Top Layer w6: v1(3768.69,2713.74) 3768.69,2751.65 R13.2
  Bottom Layer w4: v2(3478,2484.76) 3650,2484.76
  Bottom Layer w6: 3650,2484.76 3679.76,2484.76 3768.24,2573.24 3768.24,2713.29 v1(3768.69,2713.74)
NetR14_1: R14.1 U6.2 | length 185.6
  Top Layer w6: R14.1 3840,2801.83 3864.83,2777 3932.46,2777 3955.06,2799.6 U6.2@3955.06,2828.61
  Top Layer w10: U6.2@3955.06,2828.61 U6.2
NetR15_2: R15.2 U6.16 | length 57.8
  Top Layer w6: R15.2 3879.08,2827.04 3891.12,2827.04 3902.37,2838.29 U6.16@3902.37,2854.49
  Top Layer w10: U6.16@3902.37,2854.49 3902.89,2855 U6.16
NetR17_2: R17.2 R18.1 U7.6 | length 168.9
  Top Layer w6: R17.2 3999.38,2772.34 3999.38,2703.34 4015.51,2687.21 U7.6 4050.73,2687.21 4059.98,2677.96 R18.1
NetR18_2: R18.2 R19.1 U7.7 | length 87
  Top Layer w6: U7.7@4033.65,2712.42 R18.2@4084.62,2712.42 ; R18.2 R19.1
  Top Layer w10: U7.7 U7.7@4033.65,2712.42 ; R18.2@4084.62,2712.42 R18.2
NRST: C3.1 R2.1 S1.1 U1.E1 | length 351.6
  Top Layer w4: 3313.56,2656.44 3325,2645 3331.62,2645 3337.41,2644.99 3355,2627.4 3355,2583.12 3337.01,2565.13 U1.E1
  Top Layer w6: S1.1@3259.37,2854.61 C3.1 3259.37,2778.59 R2.1 3277.96,2712.04 3298,2692 3298,2672 3313.56,2656.44
  Top Layer w10: S1.1 S1.1@3259.37,2854.61
OSC1_IN: C2.2 U1.C1 XT1.1 | length 126
  Top Layer w4: 3310,2632.2 3312.56,2632.2 3317.11,2627.64 3335.86,2627.64 U1.C1
  Top Layer w6: C2.2@3261.78,2685 3265,2681.78 XT1.1@3265,2637.2 ; XT1.1 3310,2632.2 ; C2.2@3265,2683.22 C2.2@3266.78,2685
OSC1_OUT: C1.2 U1.D1 XT1.3 | length 165.9
  Top Layer w4: 3310,2560 3313.56,2563.56 3313.56,2589.14 3319.42,2595 U1.D1
  Top Layer w6: C1.2@3210,2543.22 C1.2@3210.43,2542.8 ; C1.2@3210.43,2537.8 XT1.3 3271.81,2544.61 3294.61,2544.61 3310,2560
RS485_A: P1.2 R4.1 R7.1 R11.1 U5.6 | length 1741.1
  Top Layer w6: U5.6 3340.51,3115.07 3354.93,3115.07 3374.78,3095.22 3379.37,3095.22 3388.89,3085.69 3388.89,3084.68 3390.63,3082.95 3395.23,3082.95 3415.21,3062.96 R7.1@3425,3062.96 ; R7.1 3425,3055.51 3430.63,3061.14 3446.14,3061.14 3475,3090 3530,3145 3797.29,3145 3825.17,3117.13 4033.85,3117.13 4070,3080.98 4070,3065 v1(4100,3035) R11.1 ; v1@3945.16,2455.16 P1.2@3945.16,2571.12
  Top Layer w10: v1(3945,2455) v1@3945.16,2455.16 ; P1.2@3945.16,2571.12 P1.2
  Bottom Layer w6: v1(3945,2455) 3965,2475 4045,2475 4137.11,2567.11 4137.11,2948.35 4137.11,2997.89 v1(4100,3035)
RS485_B: P1.3 R3.2 R7.2 R10.2 U5.7 | length 1733.6
  Top Layer w6: U5.7 3342.51,3138.67 3353.19,3138.67 3366.86,3125 R3.2 ; R3.2@3388.21,3125.25 3396.09,3117.37 3398.39,3117.37 3401.91,3113.86 3401.91,3110.64 3407.18,3105.37 3410.54,3105.37 3417.37,3098.54 3417.37,3096.71 R7.2 3429.45,3093.53 3450.47,3093.53 3486.37,3129.43 3513.94,3157 3802.26,3157 3830.14,3129.13 4038.82,3129.13 v1@4135,3032.95 ; P1.3 3985,2570.97 v1(3985,2455) ; R10.2@4134.81,3007.23 4135,3007.43 v1(4135,3035)
  Top Layer w10: R10.2@4134.81,3007.23 R10.2
  Bottom Layer w6: v1(3985,2455) 4045,2455 4149.11,2559.11 4149.11,3020.89 4137.11,3032.89 v1@4137.11,3035
  Bottom Layer w10: v1(4135,3035) v1@4137.11,3035
SPI1_MISO: U1.A6 U3.1 | length 284.5
  Top Layer w4: U1.A6@3495,2690 3496.4,2690 3510,2703.6 v2(3511.4,2703.6) ; v2(3640,2705) 3650,2705
  Top Layer w6: 3650,2705 3671.75,2705 3720,2753.25 3720,2764.89 3720.67,2765.56 U3.1
  Bottom Layer w4: v2(3511.4,2703.6) 3530,2685 3625.96,2685 3637.7,2696.74 3637.7,2702.7 v2(3640,2705)
SPI1_MOSI: U1.C5 U3.14 | length 323.5
  Top Layer w4: U1.C5 3475.4,2626.5 3488.9,2640 3530,2640 3541.73,2651.73 3541.73,2706.73 3550,2715
  Top Layer w6: 3550,2715 3555.94,2720.94 3670.72,2720.94 3688.16,2738.38 3688.16,2754.56 U3.14
SPI1_NSS: U1.A8 U3.12 | length 220.9
  Top Layer w4: U1.A8 3557.92,2689.49 v2(3573.23,2704.8)
  Top Layer w6: v1@3526.48,2737.19 3527.24,2737.95 3533.15,2737.95 3541.98,2746.78 3648.79,2746.78 3651.3,2749.29 U3.12
  Top Layer w10: v1(3524.95,2735.65) v1@3526.48,2737.19
  Bottom Layer w4: 3554.44,2715.29 3563.4,2706.33 v2@3573.47,2706.33
  Bottom Layer w6: v1(3524.95,2735.65) 3552.19,2715.29 3554.44,2715.29
SPI1_SCK: U1.A7 U3.13 | length 196.7
  Top Layer w4: U1.A7 3525.98,2691.11 3534.01,2699.14 3534.01,2715
  Top Layer w6: 3534.01,2715 3534.01,2719.01 3547.94,2732.94 3665.75,2732.94 3670.99,2738.18 U3.13
SWCLK: R6.1 U1.A9 | length 723.7
  Top Layer w4: U1.A9 3601.98,2676.49 3621.78,2676.49 3638.26,2660 3650,2660
  Top Layer w5: 3650,2660 3731.83,2660 3743.95,2672.12 3756.07,2684.24 3798.2,2684.24 3814.82,2684.24 3821.32,2690.74 v1(3824.83,2690.74)
  Top Layer w6: v1(4100,2845) R6.1
  Bottom Layer w6: v1(3824.83,2690.74) 4077.63,2690.74 4120,2733.11 4120,2825 v1(4100,2845)
SWDIO: R5.1 U1.A10 | length 664.9
  Top Layer w4: U1.A10 3634.96,2675 3650,2675
  Top Layer w6: 3650,2675 3730.57,2675 3751.31,2695.74 3793.44,2695.74 3809.65,2711.95 3817.7,2711.95 v1(3820,2714.25) ; v1(4105,2790) 4135,2820 R5.1
  Bottom Layer w6: v1(3820,2714.25) 4079.25,2714.25 4105,2740 v1(4105,2790)
TIM2_CH4: LED1.3 U1.K7 | length 484.4
  Top Layer w4: U1.K7 3527.61,2406.02 3543.63,2390 3650,2390
  Top Layer w6: 3650,2390 3804.24,2390 3810,2395.76 3810,2538.38 3778.34,2570.04 LED1.3
USART1_DE: U1.B10 U5.2 U5.3 | length 933
  Top Layer w4: 3313.56,2686.44 3329.01,2670.99 3342.39,2670.99 3353.91,2659.47 3353.91,2646.09 3360,2640 v2@3385,2640 ; v2(3416,2610) 3418.68,2612.68 3424.53,2612.68 3425.34,2613.5 3594.36,2613.5 3605,2624.14 3605,2642.52 U1.B10
  Top Layer w6: v1(3200,3141.18) U5.2 ; U5.3@3228.9,3115.7 U5.2@3228.9,3141.06 ; v1(3300,2730.53) 3300,2711.21 3310,2701.21 3310,2690 3313.56,2686.44
  Bottom Layer w4: v2@3385,2640 3385.5,2640 3415.5,2610 v2(3416,2610)
  Bottom Layer w6: v1(3200,3141.18) 3235,3106.18 3235,2823.79 3300,2758.79 v1(3300,2730.53)
  other v2: 3384.97,2642
USART1_RX: U1.A5 U5.1 | length 670
  Top Layer w4: 3437.48,2715 U1.A5
  Top Layer w6: v1(3200,3166.76) U5.1 ; v1(3328,2735) 3328.54,2735 3337.51,2726.03 3426.71,2726.03 3436.67,2716.07 3436.67,2715.81 3437.48,2715
  Bottom Layer w6: v1@3201.29,3166.76 3250,3118.05 3250,2830 3330,2750 3330,2737 v1(3328,2735)
  Bottom Layer w10: v1(3200,3166.76) v1@3201.29,3166.76
USART1_TX: U1.B5 U5.4 | length 646.4
  Top Layer w4: v2(3324.87,2710) 3398.65,2710 3415.64,2693.01 3415.64,2684.36 3425,2675 3445.49,2675 3462.5,2657.99 U1.B5
  Top Layer w6: v1(3200,3090) U5.4
  Bottom Layer w4: 3310,2710 v2(3324.87,2710)
  Bottom Layer w6: v1(3200,3090) 3220,3070 3220,2817.57 3275,2762.57 3275,2723.73 3288.73,2710 3310,2710
VDD: C6.2 C7.2 C8.2 C9.2 C10.2 C11.2 C12.2 C16.2 C17.2 C18.1 C19.1 C20.2 C23.2 C24.2 R2.2 R4.2 R8.1 R9.1 U1.B2 U1.D2 U1.F4 U1.F5 U1.F6 U1.H1 U1.K1 U2.3 U3.5 U3.8 U4.B3 U5.8 | length 1652
  Top Layer w4: 3305,2485 3320.98,2469.02 U1.H1 ; 3310,2400 3329.36,2400 3335.38,2406.02 U1.K1 ; 3310,2405.95 3310.07,2406.02 ; U1.B2 3368.61,2657.99 3384.87,2674.25 v2(3384.97,2674.25) ; U1.D2@3368.88,2595 3368.88,2594.5 3384,2579.38 v2(3384,2579.25) ; U1.F4 3446.14,2517.36 v2@3447.15,2517.36 ; v2@3447.24,2517.36 3448.35,2517.36 U1.F5 ; U1.F6 v2(3510.24,2516.26)
  Top Layer w4.72: U1.D2 U1.D2@3368.88,2595 ; v2(3510.24,2516.26) 3510.24,2429.76 3520,2420 3650,2420
  Top Layer w6: C10.2 C10.2@3278.8,2400 ; C6.2 3300,2490 3305,2485 ; C10.2@3282.33,2403.52 C10.2@3278.8,2400 ; 3310,2400 C10.2@3278.8,2400 ; 3339.51,2765 3340,2765.49 ; U5.8 3346.76,3166.76 3349.27,3169.27 3349.27,3176.03 3362.19,3188.95 3382.17,3188.95 C23.2@3383.22,3190 ; C20.2@3387.48,2960.63 3396.57,2964.08 3399.33,2965.13 3419.35,2965.13 cw(c3419.47,2947.13) 3419.56,2965.13 U4.B3 ; C18.1@3576.78,2834.37 3590.63,2834.37 3598.54,2826.46 U3.8 ; C16.2@3625.63,2972.13 U2.3 ; U3.5@3691.18,2845.08 3698.96,2845.08 3709.22,2855.34 C17.2@3709.22,2869.37
  Top Layer w10: C20.2@3378.52,2965.63 3384.15,2960 C20.2 ; 3650,2420 3680,2420 C8.2 ; U3.5 3690.67,2844.56 U3.5@3691.18,2845.08
  Top Layer w15: C10.2 C9.2 ; C6.2 C9.2 ; v1@3309.43,2420.57 3288.13,2441.87 3274.91,2441.87 C9.2 ; R2.2 3312.67,2760.63 3335.14,2760.63 3339.51,2765 ; v3(3319.5,2805) 3320.47,2805 3331.21,2794.73 3340,2785.94 3340,2765.49 3351.72,2753.78 3369.37,2753.78 C11.2 ; v3@3325,2805 3348.28,2828.28 R9.1 R8.1 ; C11.2 C12.2 C24.2 ; C20.2@3378.52,2965.63 3378.52,2979.14 3372.66,2985 3358.49,2985 v3(3333.81,3009.68) 3335.93,3011.8 3335.93,3034.13 3356.8,3055 R4.2 ; v3(3383.22,3160) 3383.22,3190 C23.2 ; v3(3545,2805) 3571.14,2831.14 C18.1 C19.1 ; v3(3590,2955) 3593.83,2958.83 3621.87,2958.83 3625,2961.96 C16.2 ; C8.2 C7.2 ; C17.2 v3(3770,2875)
  other v1: 3310,2420
  other v2: 3447.15,2516.26
X_ADC(ADC_INP18): C28.2 R19.2 U1.G3 | length 903.1
  Top Layer w4: U1.G3 3400,2501.06 3415.75,2516.81 v2(3415.75,2517.36)
  Top Layer w6: v1(3680,2642.5) 3682.3,2644.8 3689.31,2644.8 3689.51,2645 3733.1,2645 3755.45,2667.36 3760.84,2672.74 3839.16,2672.74 3848.43,2663.47 3848.43,2658.89 3860,2647.32 v1(3860,2645) ; v1(4030,2625) 4030,2624.94 4049.57,2605.37 4089.51,2605.37 4099.22,2615.08 4099.22,2617.37 4106.85,2625 4108.23,2625 C28.2@4110,2623.22 ; C28.2 4112.46,2625.69 4112.46,2641.12 4120,2648.65 R19.2
  Top Layer w10: C28.2@4110,2623.22 C28.2
  Bottom Layer w4: v2(3415.75,2517.36) 3433.11,2500 3515,2500 3600,2585 3632.1,2585 3650,2602.9
  Bottom Layer w6: 3650,2602.9 3678.07,2630.97 3678.07,2640.57 v1(3680,2642.5) ; v1(3860,2645) 3880,2625 v1(4030,2625)
XN: C25.1 R16.1 U6.1 U7.2 | length 286.2
  Top Layer w6: C25.1@3852.96,2712.96 R16.1 ; R16.1@3890.08,2712.88 U7.2@3936.73,2712.88 ; v1(3925,2795) 3925,2796.59 3935.44,2807.03 3935.44,2828.68 U6.1 ; U7.2 3967.8,2712.8 3978.27,2723.27 3978.27,2733.27 v1(3980,2735)
  Top Layer w10: C25.1 C25.1@3852.96,2712.96 ; R16.1 R16.1@3890.08,2712.88
  Bottom Layer w6: v1(3925,2795) 3940,2780 3971.49,2780 3980,2771.49 v1(3980,2735)
pads on no net: J1.13 J1.14 LED1.1 P1.5 P1.6 P3.5 P3.6 U1.A1 U1.A2 U1.A3 U1.B1 U1.B3 U1.B7 U1.B8 U1.B9 U1.C3 U1.C4 U1.C6 U1.C7 U1.C8 U1.C9 U1.D3 U1.D4 U1.D6 U1.D7 U1.D8 U1.D9 U1.E2 U1.E3 U1.E8 U1.F3 U1.F7 U1.F9 U1.G4 U1.G5 U1.G6 U1.G7 U1.G8 U1.G9 U1.G10 U1.H2 U1.H3 U1.H5 U1.H6 U1.H7 U1.H8 U1.H9 U1.H10 U1.J2 U1.J4 U1.J5 U1.J6 U1.J7 U1.J8 U1.J9 U1.J10 U1.K3 U1.K4 U1.K5 U1.K6 U1.K8 U1.K9 U1.K10 U2.9 U3.2 U3.3 U3.10 U5.9
copper on no net: | length 24.7
  Top Layer w4: 3353,2390 3353,2390.52 3368.5,2406.02 ; 3368.5,2436.76 3368.5,2437.52 ; 3400,2405 3400,2406.02 ; 3431.5,2437.01 3431.5,2437.52
  other v1: 3680,2965 3680,2995

## Polygon pours and split planes (outlines as drawn)
GND on GND (split plane): 4117.68,3214.69 4122.17,3213.8 4126.5,3212.33 4130.61,3210.3 4134.41,3207.76 4137.85,3204.74 4140.87,3201.3 4143.41,3197.49 4145.44,3193.39 4146.91,3189.06 4147.8,3184.57 4148.07,3180.44 4148.03,3180 4148.03,2413.86 4148.07,2413.42 4147.8,2409.29 4146.91,2404.8 4145.44,2400.47 4143.41,2396.36 4140.87,2392.56 4137.85,2389.12 4134.41,2386.1 4130.61,2383.56 4126.5,2381.53 4122.17,2380.06 4117.68,2379.17 4113.55,2378.9 4113.11,2378.94 3230.73,2378.94 3229.28,2379.01 3228.26,2379.11 3228.26,2379.12 3224.49,2379.37 3220.01,2380.26 3215.67,2381.73 3211.57,2383.76 3207.76,2386.3 3204.32,2389.32 3201.3,2392.76 3198.76,2396.57 3196.73,2400.67 3195.26,2405.01 3194.37,2409.49 3194.34,2410 3194.29,2409.99 3194.13,2411.59 3193.94,2412.21 3193.94,3180 3193.9,3180.44 3194.17,3184.57 3195.06,3189.06 3196.53,3193.39 3198.56,3197.49 3201.1,3201.3 3204.12,3204.74 3207.56,3207.76 3211.36,3210.3 3215.47,3212.33 3219.8,3213.8 3224.29,3214.69 3228.42,3214.96 3228.86,3214.92 4113.11,3214.92 4113.55,3214.96
VDD on POWER (split plane): 4108.03,2418.94 3233.94,2418.94 3233.94,3174.92 4108.03,3174.92
+5V on POWER (split plane): 4074.9,3092.89 4074.9,2507.11 4037.89,2470.1 3857.11,2470.1 3813.61,2513.6 3813.6,2513.6 3805.1,2522.11 3805.1,2890 3804.71,2891.95 3803.6,2893.6 3755.1,2942.11 3755.1,3012.89 3813.6,3071.4 3867.11,3124.9 4042.89,3124.9

## Keep-outs
Keep-Out Layer:
  lines w10: 3178.86,2410 3178.86,3180 cw(c3228.86,3180) 3228.86,3230 3995,3230 4113.11,3230 cw(c4113.11,3180) 4163.11,3180 4163.11,2413.86 cw(c4113.11,2413.86) 4113.11,2363.86 4096.54,2363.86 3995,2363.86 3229.26,2363.86 cw(c3229.26,2364.06) 3229.06,2364.06 cw(c3229.06,2414.06) 3179.06,2414.06

## Other copper
POWER (plane layer: these items are gaps in the copper):
  lines w10: 3750,2940 3800,2890 3800,2520 3810,2510 3855,2465 4040,2465 4080,2505 4080,3095 4045,3130 4025,3130 3865,3130 3810,3075 3750,3015 3750,2940

## Silkscreen, mask and mechanical layers (free items; w line width, h text height)
Top Overlay:
  text "485" at 4094,2929 h20
  text "4x8" at 3829,2879 h20
  text "SW" at 4114,2839 h20
  text "6x6" at 3764,2809 h20

## Text inside footprints (layer, text, board x,y; h text height)
U1: Top Overlay "A" at 3295,2695 h15; Top Overlay "K" at 3300,2380 h15; Top Overlay "1" at 3315,2720 h15 r90; Top Overlay "10" at 3655,2725 h15 r270; Bottom Overlay "A" at 3293.24,2639.49 h50; Bottom Overlay "K" at 3313.24,2382.26 h15; Bottom Overlay "1" at 3287.01,2733.26 h50 r270; Bottom Overlay "10" at 3615,2720 h50; Mechanical 13 "A" at 3243.24,2639.49 h50; Mechanical 13 "K" at 3290,2360 h15; Mechanical 13 "1" at 3387.01,2733.26 h50 r90; Mechanical 13 "10" at 3655,2725 h50 r270